# Allegro board AVRUSB500.brd
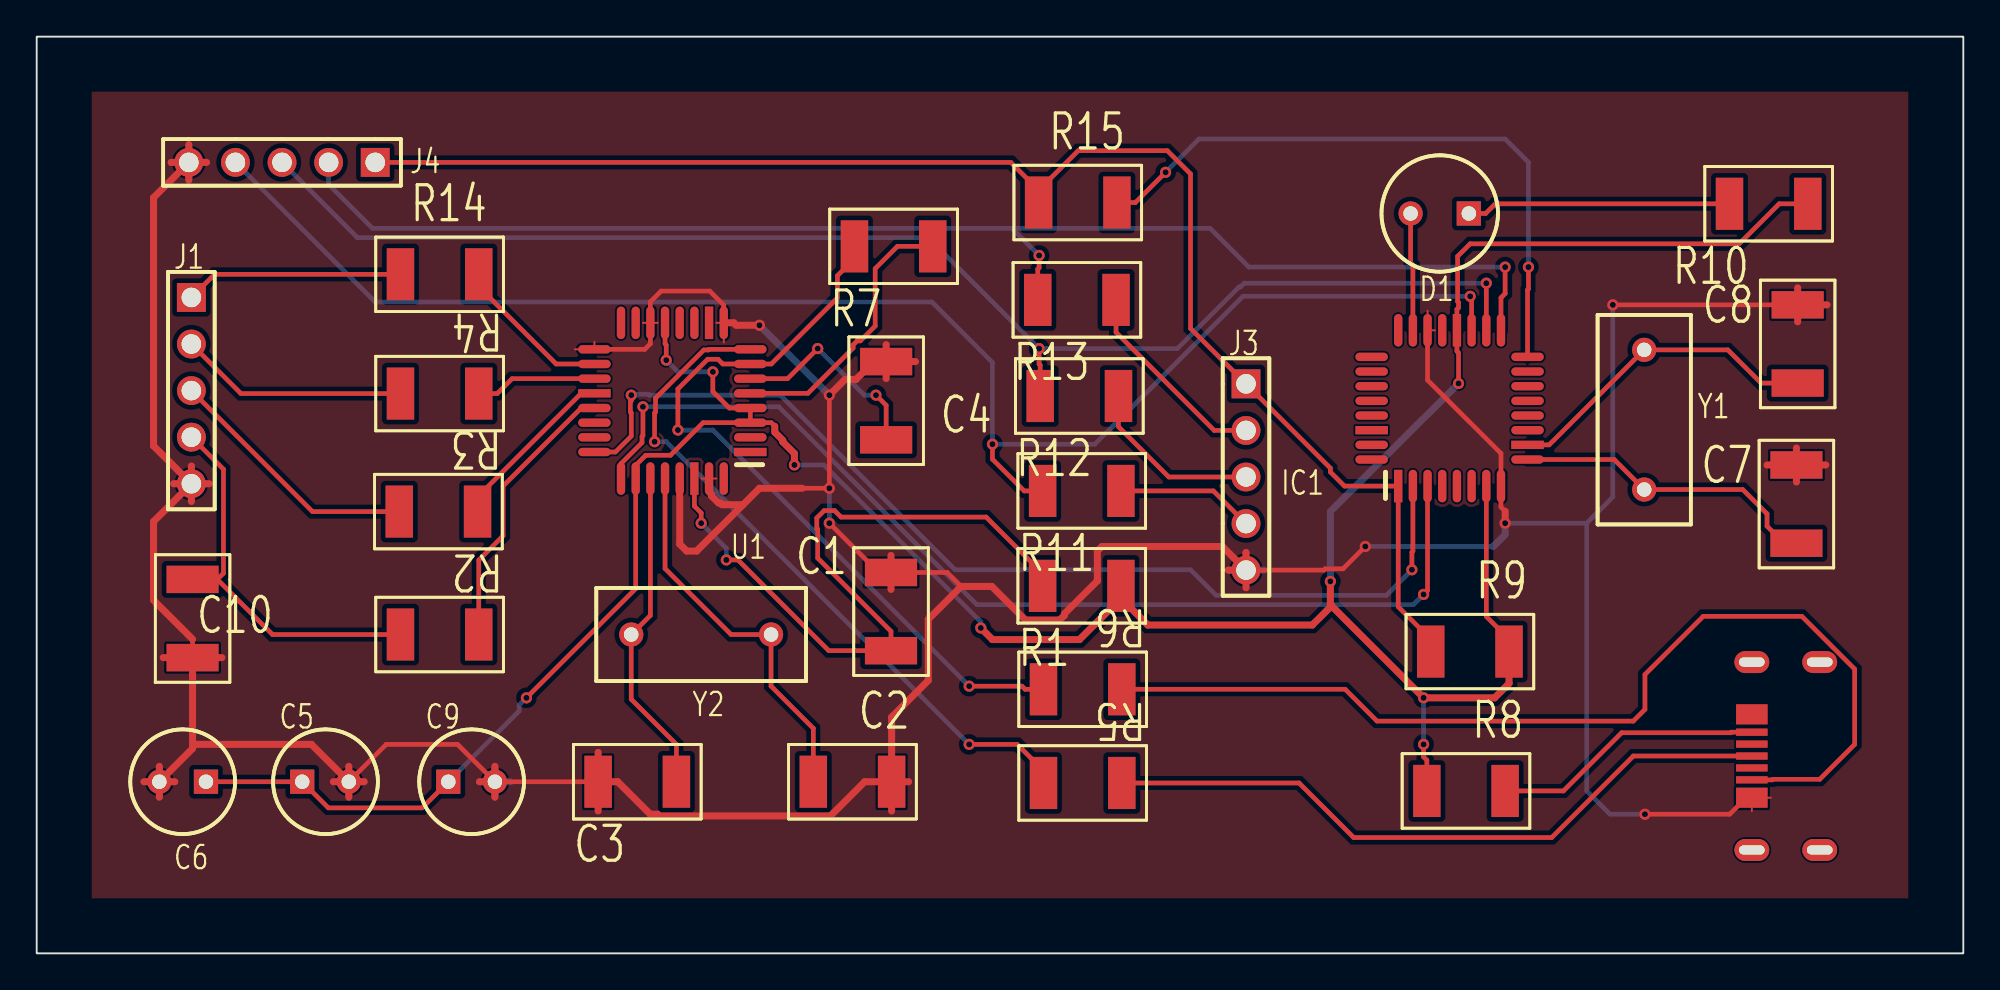
[diagram p0: board, top side]
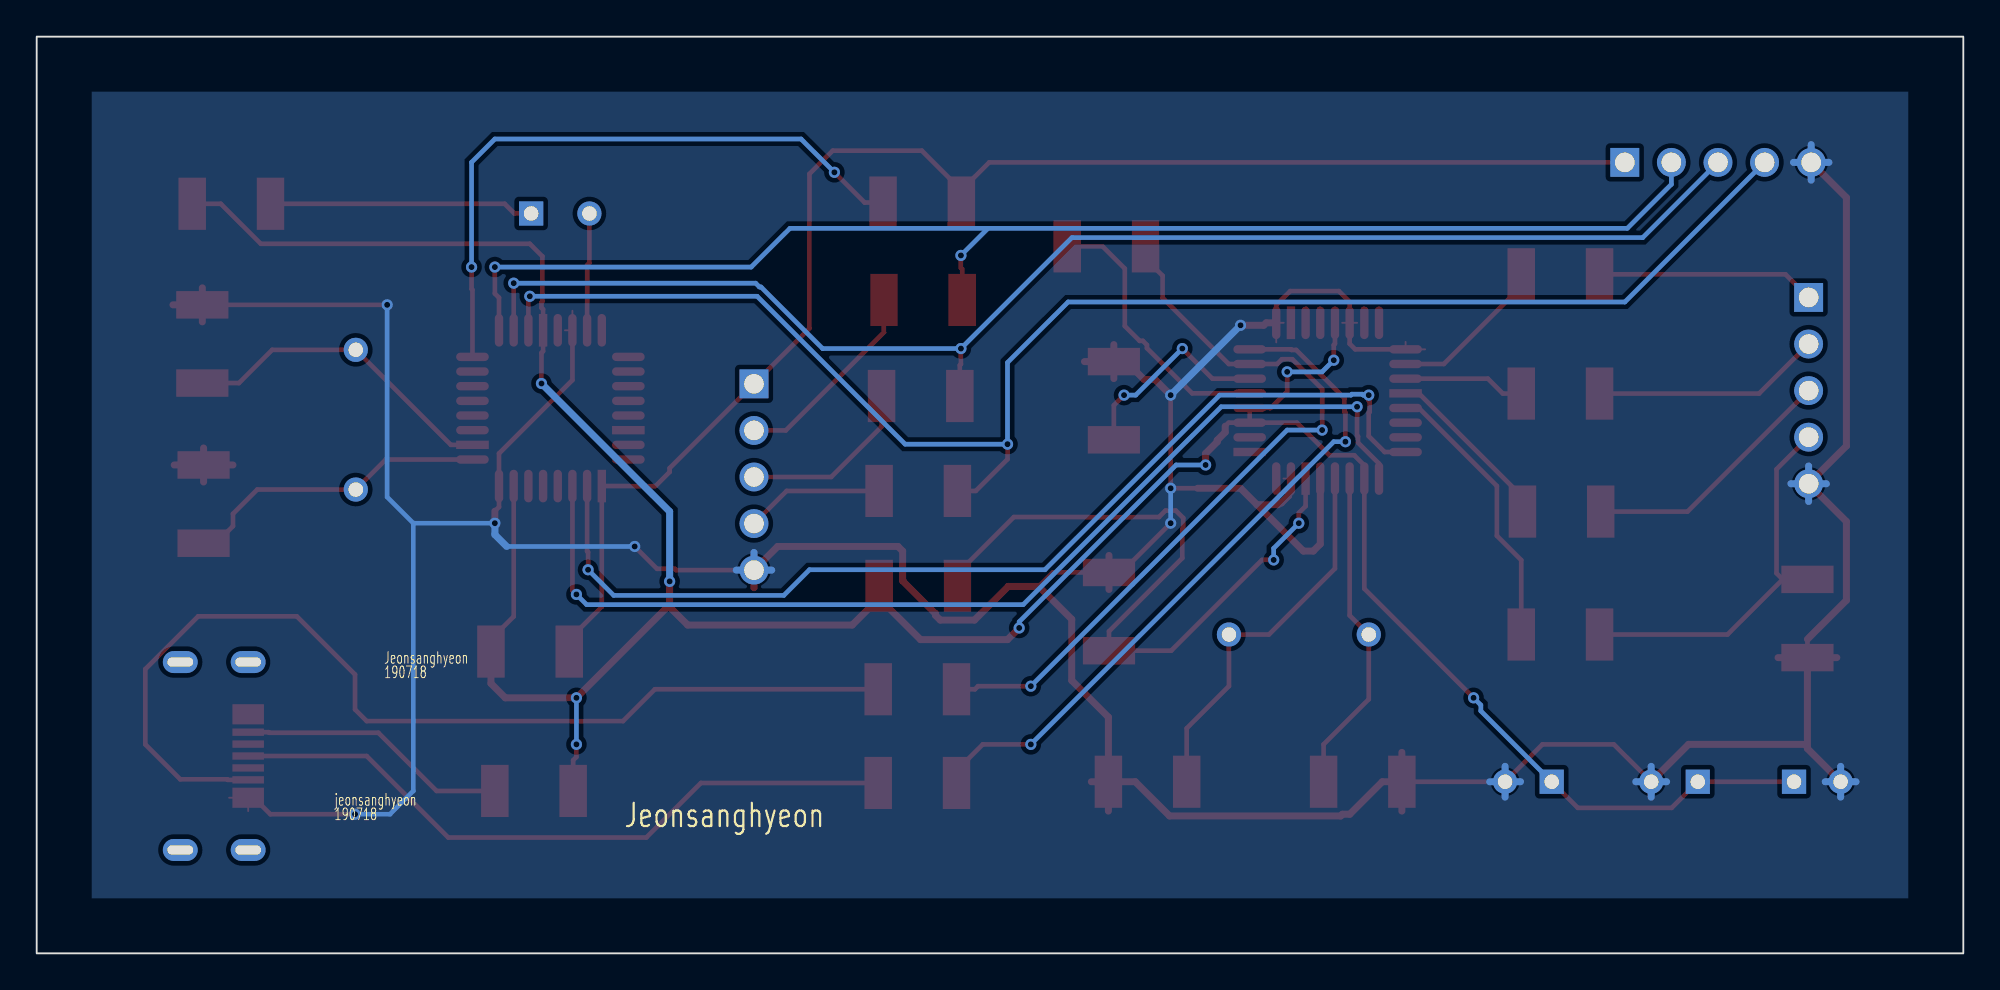
[diagram p1: board, bottom side, seen from below]

Outline 105 x 50 mm; copper layers: TOP, BOTTOM. Coordinates in mm from the lower left corner of the outline.
Outline path: rectangle 0,0 105,50

## Design rules (mm)
constraint set DEFAULT: min track width 0.254
net group POWERNETS: nets VCC

## Placement (name value [footprint] x y rotation side)
C1  47nF  [CPCYL1D225LS100031]  46.56 20.77 270 top
C2  27pF  [CPCYL1D225LS100031]  46.59 9.36 180 top
C3  27pF  [CPCYL1D225LS100031]  30.6 9.36 0 top
C4  47nF  [CPCYL1D225LS100031]  46.3 28.01 90 top
C5  100nF  [CPCYL1D225LS100031#2]  14.47 9.36 0 top
C6  1uF  [CPCYL1D225LS100031#2]  9.23 9.36 180 top
C7  100nF  [CPCYL1D225LS100031]  95.91 26.64 270 top
C8  100nF  [CPCYL1D225LS100031]  95.97 35.37 270 top
C9  100nF  [CPCYL1D225LS100031#2]  22.43 9.36 0 top
C10  22nF  [CPCYL1D225LS100031]  8.5 16.13 90 top
D1  LED  [CYLD250LS125031]  78.05 40.35 180 top
IC1  ATmega8  [QUAD80M32WG900]  74.2 25.49 0 top
J1  bbpg_Bitbang  [BLKCON100VHTM1SQSW1005]  8.43 35.77 270 top
J2  USBA  [MICRO_USB]  97.17 10.76 90 top
J3  avrusb500_out  [BLKCON100VHTM1SQSW1005]  65.91 31.06 270 top
J4  firmware_in  [BLKCON100VHTM1SQSW1005]  18.45 43.14 180 top
NOREF  -  []  105 0 90 top
NOREF#2  -  []  0 50 0 top
R1  470  [AX400X100031]  54.82 20.05 0 top
R2  220  [AX400X100031]  24.09 17.39 180 top
R3  220  [AX400X100031]  24.03 24.09 180 top
R4  220  [AX400X100031]  24.09 30.53 180 top
R5  27  [AX400X100031]  59.14 9.29 180 top
R6  27  [AX400X100031]  59.14 14.4 180 top
R7  1.5k  [AX400X100031]  44.57 38.56 0 top
R8  2.2  [AX400X100031]  80.03 8.86 180 top
R9  10k  [AX400X100031]  80.24 16.46 180 top
R10  470  [AX400X100031]  92.26 40.88 0 top
R11  1k  [AX400X100031]  54.82 25.22 0 top
R12  220  [AX400X100031]  54.69 30.4 0 top
R13  1k  [AX400X100031]  54.56 35.64 0 top
R14  220  [AX400X100031]  24.09 37.04 180 top
R15  220  [AX400X100031]  58.87 40.95 180 top
U1  FT232BM  [QUAD80M32WG900]  38.89 27.34 90 top
Y1  3.6864Mhz  [RAD450X200LS300031]  87.61 32.92 270 top
Y2  6Mhz  [RAD450X200LS300031]  40.02 17.39 180 top

## Library data of the parts
C1-C4 C7 C8 C10 = CAPACITOR NON-POL: alternate symbols: (SML2015)
C5 C9 = CAPACITOR NON-POL: alternate symbols: (SMDCAP)
C6 = CAPACITOR POL: alternate symbols: (SMDCAP)
D1 = LED
IC1 = ATmega8-DIL28_1
J1 J3 J4 = CON5
J2 = CON4_7
R1-R15 = R: alternate symbols: (SML2015)
U1 = FT232BM_2: alternate symbols: (JEDECMS026)
Y1 Y2 = ZTA

## Footprints (pads in the part's own frame, mm; a bottom-side part is the same pattern mirrored in y, then rotated)
AX400X100031
  rect 1.499x2.845 smd: 1(0,0) 2(4.267,0)
BLKCON100VHTM1SQSW1005
  rect 1.575x1.575 hole 1.067: 1(0,0)
  round 1.575 hole 1.067: 2(2.54,0) 3(5.08,0) 4(7.62,0) 5(10.16,0)
CPCYL1D225LS100031
  rect 1.499x2.845 smd: 1(0,0) 2(4.267,0)
CPCYL1D225LS100031#2
  rect 1.321x1.321 hole 0.787: 1(0,0)
  round 1.321 hole 0.787: 2(2.54,0)
CYLD250LS125031
  rect 1.321x1.321 hole 0.787: 1(0,0)
  round 1.321 hole 0.787: 2(3.175,0)
MICRO_USB
  oval 1.2x1.9 hole 0.5x1.4: (-5.125,3.7) (-5.125,0) (5.125,3.7) (5.125,0)
  rect 0.4x1.72 smd: (-0.65,3.7) (0.65,3.7) 2(-1.3,3.7) 3(0,3.7) 4(1.3,3.7)
  rect 1.1x1.72 smd: 1(-2.275,3.7) 5(2.275,3.7)
QUAD80M32WG900
  rect 0.457x1.778 smd: 1(0,0) 20(3.2,8.496)
  oval 0.457x1.778 smd: 2(0.8,0) 3(1.6,0) 4(2.4,0) 5(3.2,0) 6(4,0) 7(4.801,0) 8(5.601,0) 17(5.601,8.496) 18(4.801,8.496) 19(4,8.496) 21(2.4,8.496) 22(1.6,8.496) 23(0.8,8.496) 24(0,8.496)
  oval 1.778x0.457 smd: 9(7.048,1.448) 11(7.048,3.048) 12(7.048,3.848) 13(7.048,4.648) 14(7.048,5.448) 15(7.048,6.248) 16(7.048,7.048) 25(-1.448,7.048) 26(-1.448,6.248) 27(-1.448,5.448) 28(-1.448,4.648) 29(-1.448,3.848) 31(-1.448,2.248) 32(-1.448,1.448)
  rect 1.778x0.457 smd: 10(7.048,2.248) 30(-1.448,3.048)
RAD450X200LS300031
  round 1.321 hole 0.787: 1(0,0) 2(7.62,0)

## Nets
+5V: J2.4 R8.1
GND: C1.1 C2.1 C3.1 C4.2 C5.2 C6.2 C7.1 C8.1 C9.2 C10.1 IC1.8 IC1.22 J1.5 J2.1 J3.5 J4.5 U1.9 U1.14 U1.17 U1.29 U1.31
VCC: C5.1 C6.1 C9.1 IC1.7(VCC) IC1.20 R1.2 R8.2 R9.1 R10.2 U1.3 U1.4 U1.13 U1.26
BMISO: J1.3 R3.2
BMOSI: J1.2 R4.2
BRESET: J1.1 R14.2
BSCK: C10.2 J1.4 R2.2
D+: J2.2 R6.1
D-: J2.3 R5.1
F_MISO: IC1.18 J4.3 R12.1
F_MOSI: IC1.17 J4.2 R13.1
F_SCK: IC1.19 J4.4 R11.1
MISO: J3.3 R12.2
MOSI: J3.2 R13.2
RESET: IC1.1 J3.1 J4.1 R9.2 R15.2
RXD: IC1.2 U1.24
SCK: J3.4 R11.2
TXD: IC1.3 U1.25
N02483: R6.2 R7.1 U1.7
N02615: R5.2 U1.8
N03527: C4.1 U1.6
N06839: R2.1 U1.21
N06967: R3.1 U1.20
N07033: R4.1 U1.19
N07247: R14.1 U1.18
N11951: R7.2 U1.5
N41098: C3.2 U1.27 Y2.2
N41106: C2.2 U1.28(XTOUT) Y2.1
N49165: C1.2 R1.1 U1.30
N96485: D1.2(CATHODE) IC1.23
N96489: D1.1 R10.1
N96501: C7.2 IC1.9 Y1.2
N96637: C8.2 IC1.10 Y1.1
N96779: IC1.16 R15.1

Pads without a net: IC1 4 5 6 11 12 13 14 15 21 24 25 26 27 28 29 30 31 32; J2 5; U1 1 2 10 11 12 15 16 22 23 32

## Via types
v1: diameter 0.61, hole 0.33, TOP to BOTTOM, 37 vias

## Routing (per net, layer and track width the routed paths; a pad name or vN(x,y) marks a point on that pad's centre or on a via; arc(x,y) is an arc through that point)
+5V: length 14.8
  TOP w0.254: J2.4 92.36,12.06 92.33,12.03 86.38,12.03 83.2,8.86 R8.1
GND: length 316.1
  TOP w0.1: 33.85,34.39 U1.14 33.04,34.39 ; 30.4,33.35 U1.17 29.33,32.95 ; 37.05,25.9 U1.31 36.24,25.9 ; 75.8,35.05 IC1.22 76.21,33.98 ; 94.51,8.49 93.48,8.49 93.48,7.76 ; 37.44,33.33 U1.9 37.04,34.39
  TOP w0.254: 36.64,25.09 U1.31 ; 8.5,11.17 8.72,11.4 ; 41.73,25.37 v1(43.2,25.37) v1(43.2,30.45) ; v1(72.41,22.19) 71.19,20.97 70.22,20.97 70.15,20.9 J3.5 ; C3.1 C9.2 22.93,11.4 19.05,11.4 C5.2 ; C8.1 v1(85.9,35.37) ; 93.48,8.49 93.17,8.49 92.27,7.59 v1(87.65,7.59) ; 80.03,24.12 79.8,24.34 IC1.8 79.8,27.27 75.8,31.27 IC1.22 ; 8.5,17.13 C10.1 ; U1.17 33.14,32.95 33.44,33.25 U1.14 33.44,35.54 34.03,36.12 36.68,36.12 37.44,35.36 37.44,34.73 ; 50.38,20.01 49.62,20.77 C1.1 45.89,20.77 v1(43.2,23.46)
  TOP w0.381: C8.1 95.97,36.3 ; C8.1 97.57,35.37 ; C8.1 95.97,34.45 ; 6.68,8.52 C6.2 ; C6.2 7.52,9.36 ; C6.2 6.68,10.2 ; C6.2 8.5,11.17 C10.1 ; C6.2 5.85,9.36 ; C4.2 46.3,33.2 ; C4.2 45.62,32.28 44.65,31.3 44.06,31.3 v1(43.2,30.45) ; C4.2 46.3,31.35 ; C4.2 47.9,32.28 ; J3.5 64.62,22.19 58.06,22.19 57.8,21.94 57.8,20.32 56.02,18.53 56.02,18.44 55.76,18.18 53.89,18.18 52.05,20.01 50.38,20.01 48.59,18.22 48.59,14.88 46.59,12.88 C2.1 ; J3.5 64.94,20.9 ; J3.5 65.91,19.94 ; J3.5 65.91,21.87 ; J1.5 6.37,27.67 6.37,41.22 J4.5 ; J1.5 6.37,23.55 6.37,19.26 8.5,17.13 ; J1.5 8.43,24.65 ; J1.5 9.4,25.62 ; J1.5 8.43,26.58 ; J1.5 7.46,25.62 ; 46.59,7.76 C2.1 ; C2.1 45.13,9.36 43.26,7.49 33.93,7.49 33.84,7.59 33.44,7.59 31.66,9.36 C3.1 ; C2.1 47.52,9.36 ; 95.91,25.71 C7.1 ; C7.1 97.51,26.64 ; C7.1 95.91,27.56 ; C7.1 94.3,26.64 ; 17.01,8.52 C5.2 ; C5.2 17.01,10.2 ; C5.2 14.97,11.4 8.72,11.4 ; C5.2 16.17,9.36 ; C5.2 17.85,9.36 ; 41.73,25.37 39.39,25.37 38.49,24.47 ; 80.03,24.12 v1(80.03,23.46) ; 30.6,7.76 C3.1 ; C3.1 30.6,10.96 ; 38.49,24.47 35.96,21.94 35.43,21.94 35.04,22.32 U1.29 ; 38.49,24.47 37.35,24.47 37.26,24.56 37.17,24.56 36.77,24.96 36.77,25.05 36.64,25.17 ; 46.56,21.7 C1.1 46.56,19.85 ; 8.29,42.18 J4.5 ; J4.5 8.29,44.11 ; J4.5 7.32,43.14 ; J4.5 9.26,43.14 ; 24.13,9.36 C9.2 ; C9.2 24.97,8.52 ; C9.2 24.97,10.2 ; C10.1 10.1,16.13 ; C10.1 6.89,16.13 ; U1.9 37.99,34.39 38.13,34.26 v1(39.39,34.26)
  BOTTOM w0.254: v1(80.03,23.46) 84.48,23.46 ; 84.48,23.46 85.9,24.89 v1(85.9,35.37) ; 84.48,23.46 84.48,8.86 85.75,7.59 v1(87.65,7.59) ; v1(72.41,22.19) 79.38,22.19 ; v1(43.2,23.46) v1(43.2,25.37)
  BOTTOM w0.381: C9.2 25.81,9.36 ; C9.2 24.97,8.52 ; C9.2 24.13,9.36 ; C9.2 24.97,10.2 ; 7.46,25.62 J1.5 ; J1.5 9.4,25.62 ; J1.5 8.43,24.65 ; J1.5 8.43,26.58 ; 79.38,22.19 80.03,22.84 v1(80.03,23.46) ; 7.32,43.14 J4.5 ; J4.5 8.29,42.18 ; J4.5 9.26,43.14 ; J4.5 8.29,44.11 ; C5.2 17.01,10.2 ; C5.2 17.85,9.36 ; C5.2 17.01,8.52 ; C5.2 16.17,9.36 ; 5.85,9.36 C6.2 ; C6.2 6.68,10.2 ; C6.2 7.52,9.36 ; C6.2 6.68,8.52 ; v1(43.2,30.45) v1(39.39,34.26) ; 64.94,20.9 J3.5 ; J3.5 65.91,21.87 ; J3.5 66.87,20.9
VCC: length 163.1
  TOP w0.254: 40.23,28.75 40.04,28.95 U1.3 ; v1(77.49,31.08) 77.49,32.75 77.4,32.84 IC1.20 77.4,35.13 77.49,35.21 77.49,35.5 77.44,35.55 77.44,38.02 78.12,38.7 92.79,38.7 94.97,40.88 R10.2 ; C9.1 21.01,7.94 15.89,7.94 C5.1 C6.1 ; IC1.7 79,18.37 80.24,17.13 R9.1 ; v1(26.69,13.94) 32.64,19.89 U1.26 32.64,26.62 33.19,27.17 34.54,27.17 36.32,28.95 U1.3 ; U1.3 U1.4 37.75,29.74 36.85,30.64 v1(36.85,31.72) ; R8.2 75.76,10.53 75.59,10.71 v1(75.59,11.4) ; U1.13 34.24,33.25 34.31,33.18 v1(34.31,32.35)
  TOP w0.381: v1(51.46,17.75) 52.09,17.11 56.83,17.11 59.09,19.37 ; 70.57,18.95 69.52,17.91 60.55,17.91 59.09,19.37 ; 70.57,18.95 v1(75.59,13.94) 79.46,13.94 80.24,14.72 R9.1 ; 70.57,18.95 70.51,19.02 v1(70.51,20.29) ; 59.09,19.37 R1.2 ; 40.23,28.75 40.23,28.42 40.66,27.99 40.66,27.9 41.3,27.27 v1(41.3,26.64)
  BOTTOM w0.254: v1(51.46,17.75) 51.46,18.08 42.9,26.64 v1(41.3,26.64) ; C9.1 26.29,13.22 26.29,13.54 v1(26.69,13.94) ; v1(34.31,32.35) 34.95,31.72 v1(36.85,31.72) ; v1(75.59,13.94) v1(75.59,11.4)
  BOTTOM w0.381: v1(70.51,20.29) 70.51,24.1 v1(77.49,31.08)
BMISO: length 14.1
  TOP w0.254: R3.2 15.03,24.09 J1.3
BMOSI: length 12.5
  TOP w0.254: J1.2 11.13,30.53 R4.2
BRESET: length 11.9
  TOP w0.254: J1.1 9.69,37.04 R14.2
BSCK: length 21.2
  TOP w0.254: 9.84,20.4 12.85,17.39 R2.2 ; 9.84,20.4 C10.2 ; 9.84,20.4 10.18,20.73 10.18,26.41 J1.4
D+: length 55.8
  TOP w0.254: J2.2 94.59,9.46 94.62,9.49 97.17,9.49 99.08,11.4 99.08,15.5 96.2,18.38 90.83,18.38 87.65,15.21 87.65,13.3 87.02,12.67 73.05,12.67 71.31,14.4 R6.1
D-: length 38.1
  TOP w0.254: 59.14,9.97 R5.1 68.8,9.29 71.78,6.32 82.57,6.32 87.02,10.76 J2.3
F_MISO: length 76.5
  TOP w0.254: R12.1 54.69,32.08 54.63,32.14 v1(54.63,32.99) ; IC1.18 v1(79,36.55)
  BOTTOM w0.254: J4.3 17.47,39.04 48.58,39.04 v1(54.63,32.99) 62.17,32.99 65.53,36.35 65.61,36.35 65.82,36.55 v1(79,36.55)
F_MOSI: length 75.3
  TOP w0.254: v1(80.03,37.43) 80.03,35.99 79.8,35.76 IC1.17 ; R13.1 54.56,37.32 54.63,37.39 v1(54.63,38.07)
  BOTTOM w0.254: 53.15,39.55 63.95,39.55 66.06,37.43 v1(80.03,37.43) ; 53.15,39.55 18.31,39.55 15.91,41.95 J4.2 ; 53.15,39.55 v1(54.63,38.07)
F_SCK: length 85.8
  TOP w0.254: v1(52.09,27.77) 52.09,26.95 53.82,25.22 R11.1 ; IC1.19 78.2,35.76 v1(78.12,35.84)
  BOTTOM w0.254: 10.83,43.14 18.45,35.53 48.79,35.53 52.09,32.23 v1(52.09,27.77) 57.67,27.77 65.74,35.84 v1(78.12,35.84)
MISO: length 9.8
  TOP w0.254: R12.2 58.96,28.72 61.7,25.98 J3.3
MOSI: length 11.1
  TOP w0.254: J3.2 64.18,28.52 58.82,33.87 R13.2
RESET: length 80.3
  TOP w0.254: J4.1 53.09,43.14 54.61,41.63 ; 54.61,41.63 56.76,43.78 61.62,43.78 62.89,42.51 62.89,34.09 J3.1 70.51,26.47 70.51,26.26 71.27,25.49 IC1.1 74.2,18.91 75.98,17.13 R9.2 ; 54.61,41.63 R15.2
RXD: length 56.9
  TOP w0.254: v1(74.95,20.92) 74.95,21.88 75,21.93 IC1.2 ; v1(32.41,30.45) 32.41,30.15 32.35,30.1 32.35,29.53 32.41,29.48 32.41,28.21 31.54,27.34 U1.24
  BOTTOM w0.254: v1(74.95,20.92) 73.55,19.53 64.28,19.53 62.89,20.92 50.05,20.92 40.53,30.45 33.38,30.45 33.32,30.5 32.76,30.5 32.7,30.45 v1(32.41,30.45)
SCK: length 7.6
  TOP w0.254: J3.4 64.13,25.22 R11.2
TXD: length 57.7
  TOP w0.254: U1.25 31.84,26.71 32.99,27.86 32.99,28.19 33.04,28.24 v1(33.04,29.81) ; v1(75.59,19.58) 75.8,19.79 IC1.3
  BOTTOM w0.254: v1(33.04,29.81) 40.44,29.81 51.24,19.02 75.03,19.02 v1(75.59,19.58)
N02483: length 42.2
  TOP w0.254: R7.1 44.57,37.89 43.64,36.96 43.64,35.75 40.04,32.15 U1.7 37.39,32.15 37.13,32.4 36.57,32.4 34.95,30.78 v1(34.95,28.54) ; R6.2 53.87,14.4 53.7,14.57 v1(50.82,14.57)
  BOTTOM w0.254: v1(34.95,28.54) 36.85,28.54 v1(50.82,14.57)
N02615: length 38
  TOP w0.254: v1(33.68,27.91) 33.68,29.48 33.73,29.53 33.73,30.28 36.36,32.91 36.61,32.91 36.64,32.95 U1.8 ; v1(50.82,11.4) 53.44,11.4 54.87,9.97 R5.2
  BOTTOM w0.254: v1(50.82,11.4) 34.31,27.91 v1(33.68,27.91)
N03527: length 11.2
  TOP w0.254: U1.6 40.92,31.34 v1(42.57,32.99) ; C4.1 46.3,29.89 v1(45.74,30.45)
  BOTTOM w0.254: v1(45.74,30.45) 45.11,30.45 v1(42.57,32.99)
N06839: length 15.4
  TOP w0.254: U1.21 29.67,29.74 25.42,25.49 25.42,22.78 24.09,21.45 R2.1
N06967: length 9.5
  TOP w0.254: R3.1 24.03,24.9 29.67,30.55 U1.20
N07033: length 6.6
  TOP w0.254: R4.1 25.1,30.53 25.91,31.34 U1.19
N07247: length 8.7
  TOP w0.254: U1.18 28.31,32.15 24.09,36.36 R14.1
N11951: length 15.2
  TOP w0.254: R7.2 46.91,38.56 45.7,37.35 45.7,34.22 44.89,33.41 44.71,33.41 44.49,33.18 44.49,33.01 42.03,30.55 U1.5
N41098: length 18
  TOP w0.254: U1.27 33.44,18.43 Y2.2 32.4,13.86 34.86,11.4 C3.2
N41106: length 21.2
  TOP w0.254: C2.2 42.33,12.27 40.02,14.57 Y2.1 37.84,17.39 34.24,20.99 U1.28
N49165: length 39.7
  TOP w0.254: v1(36.22,23.46) 36.22,24.02 35.84,24.39 U1.30 ; v1(37.58,21.46) 38.22,21.46 43.17,16.51 C1.2 46.56,17.56 42.57,21.56 42.57,23.13 42.51,23.18 42.51,23.75 42.92,24.15 43.48,24.15 43.84,23.8 51.74,23.8 54.82,20.72 R1.1
  BOTTOM w0.254: v1(36.22,23.46) 37.58,22.09 v1(37.58,21.46)
N96485: length 6.4
  TOP w0.254: IC1.23 75,37.54 74.88,37.66 D1.2
N96489: length 14.4
  TOP w0.254: R10.1 79.5,40.88 78.97,40.35 D1.1
N96501: length 16.9
  TOP w0.254: IC1.9 85.97,26.94 87.61,25.3 92.98,25.3 94.3,23.97 94.3,23.3 95.23,22.37 C7.2
N96637: length 17.6
  TOP w0.254: IC1.10 82.43,27.74 Y1.1 92.17,32.92 93.98,31.11 C8.2
N96779: length 35
  TOP w0.254: R15.1 59.88,40.95 v1(61.53,42.6) ; IC1.16 81.25,36.19 81.3,36.24 v1(81.3,37.43)
  BOTTOM w0.254: v1(81.3,37.43) 81.3,43.15 80.03,44.42 63.34,44.42 v1(61.53,42.6)

## Copper pours and planes (outline as drawn; the poured copper is in the pictures)
+5V on BOTTOM: 3,3 3,47 102,47 102,3 ; 1 cut-out
GND on TOP: 3,3 3,47 102,47 102,3 ; 7 cut-outs
GND on BOTTOM: 3,3 3,47 102,47 102,3 ; 2 cut-outs

## Text on the board
Ref Des/Silkscreen Bottom: Jeonsanghyeon | 190718 | jeonsanghyeon
DIMENSION: FIGURE | FINISHED_SIZE | 0.33 | 0.7869 | 1.0671 | 1.4x0.5001 | DRILL CHART: TOP to BOTTOM | ALL UNITS ARE IN MILLIMETERS | PLATED | QTY | 37 | 12 | 15 | 4
